# Altium PCB SolenoidValveDriver_v01_PCB.PcbDoc
Units mm, origin at the board's own origin, x right, y up, seen from the top; angles counter-clockwise.
Board outline 35 x 28 mm, 2 copper layers (Top Layer, Bottom Layer); 20 components, 12 nets, 63 pads, 10 vias.
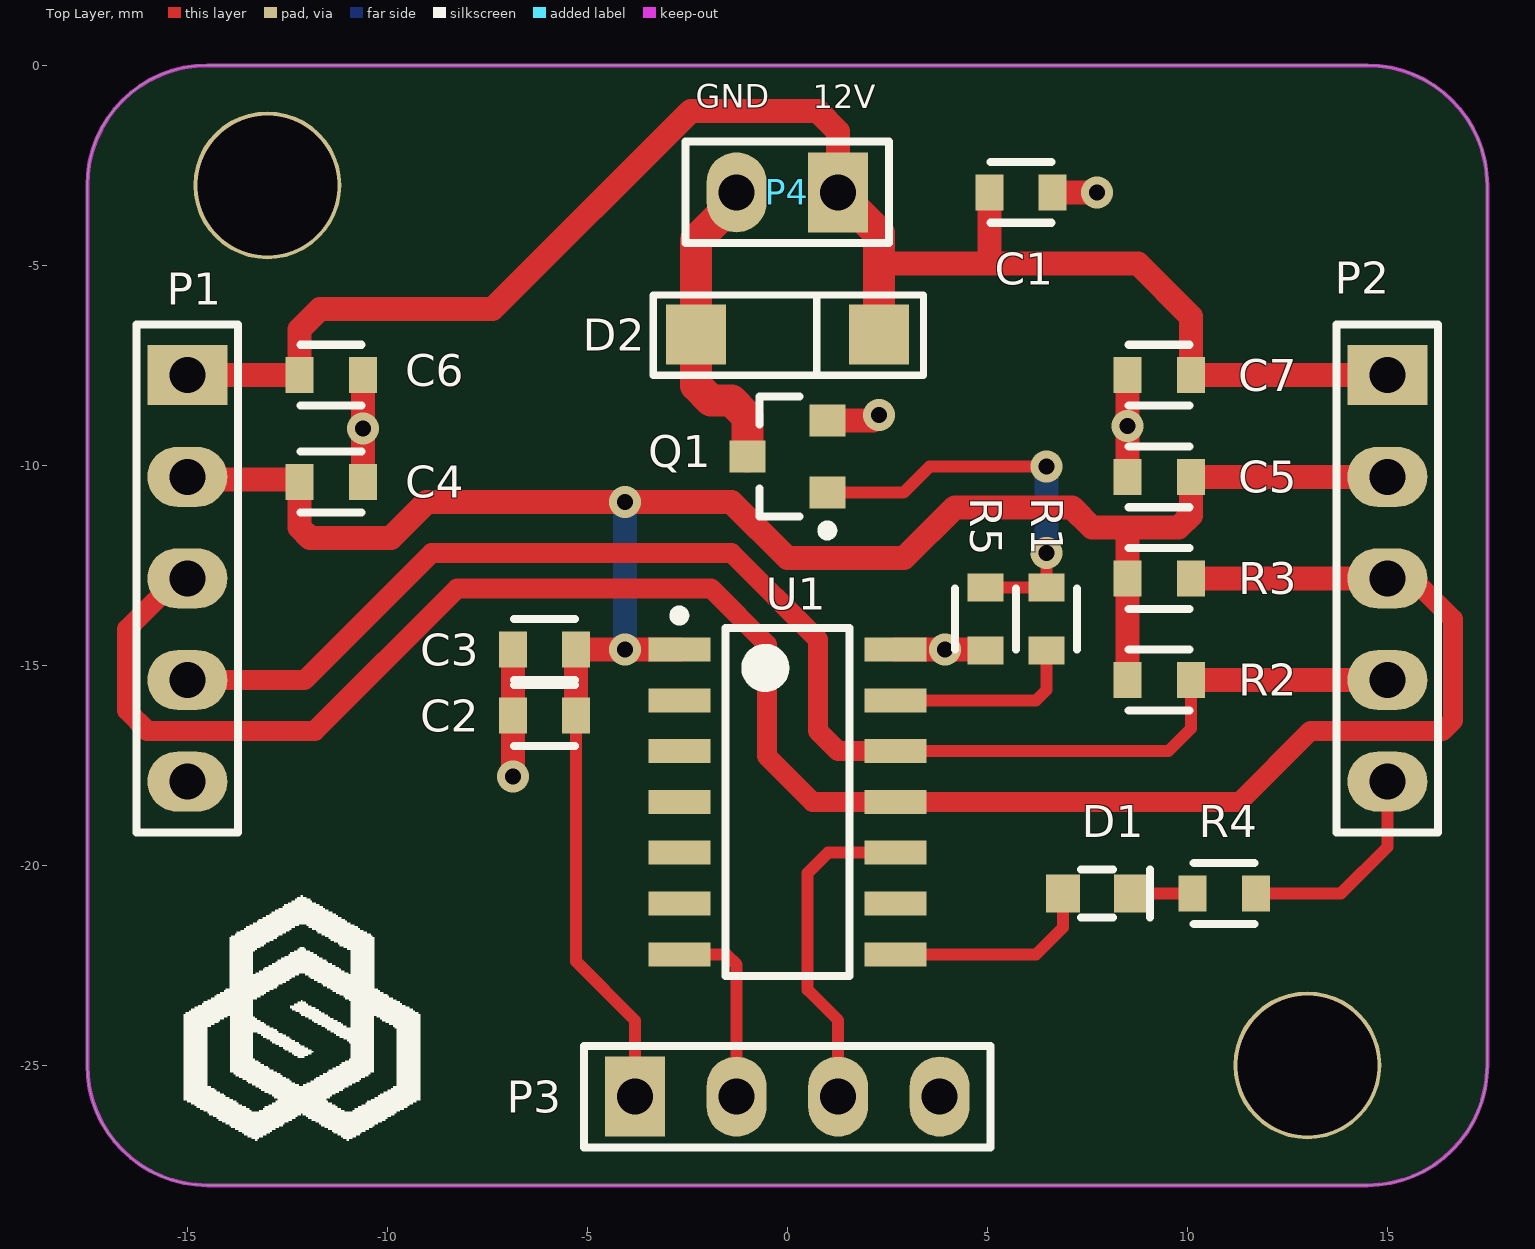
[diagram p0: Top Layer view]
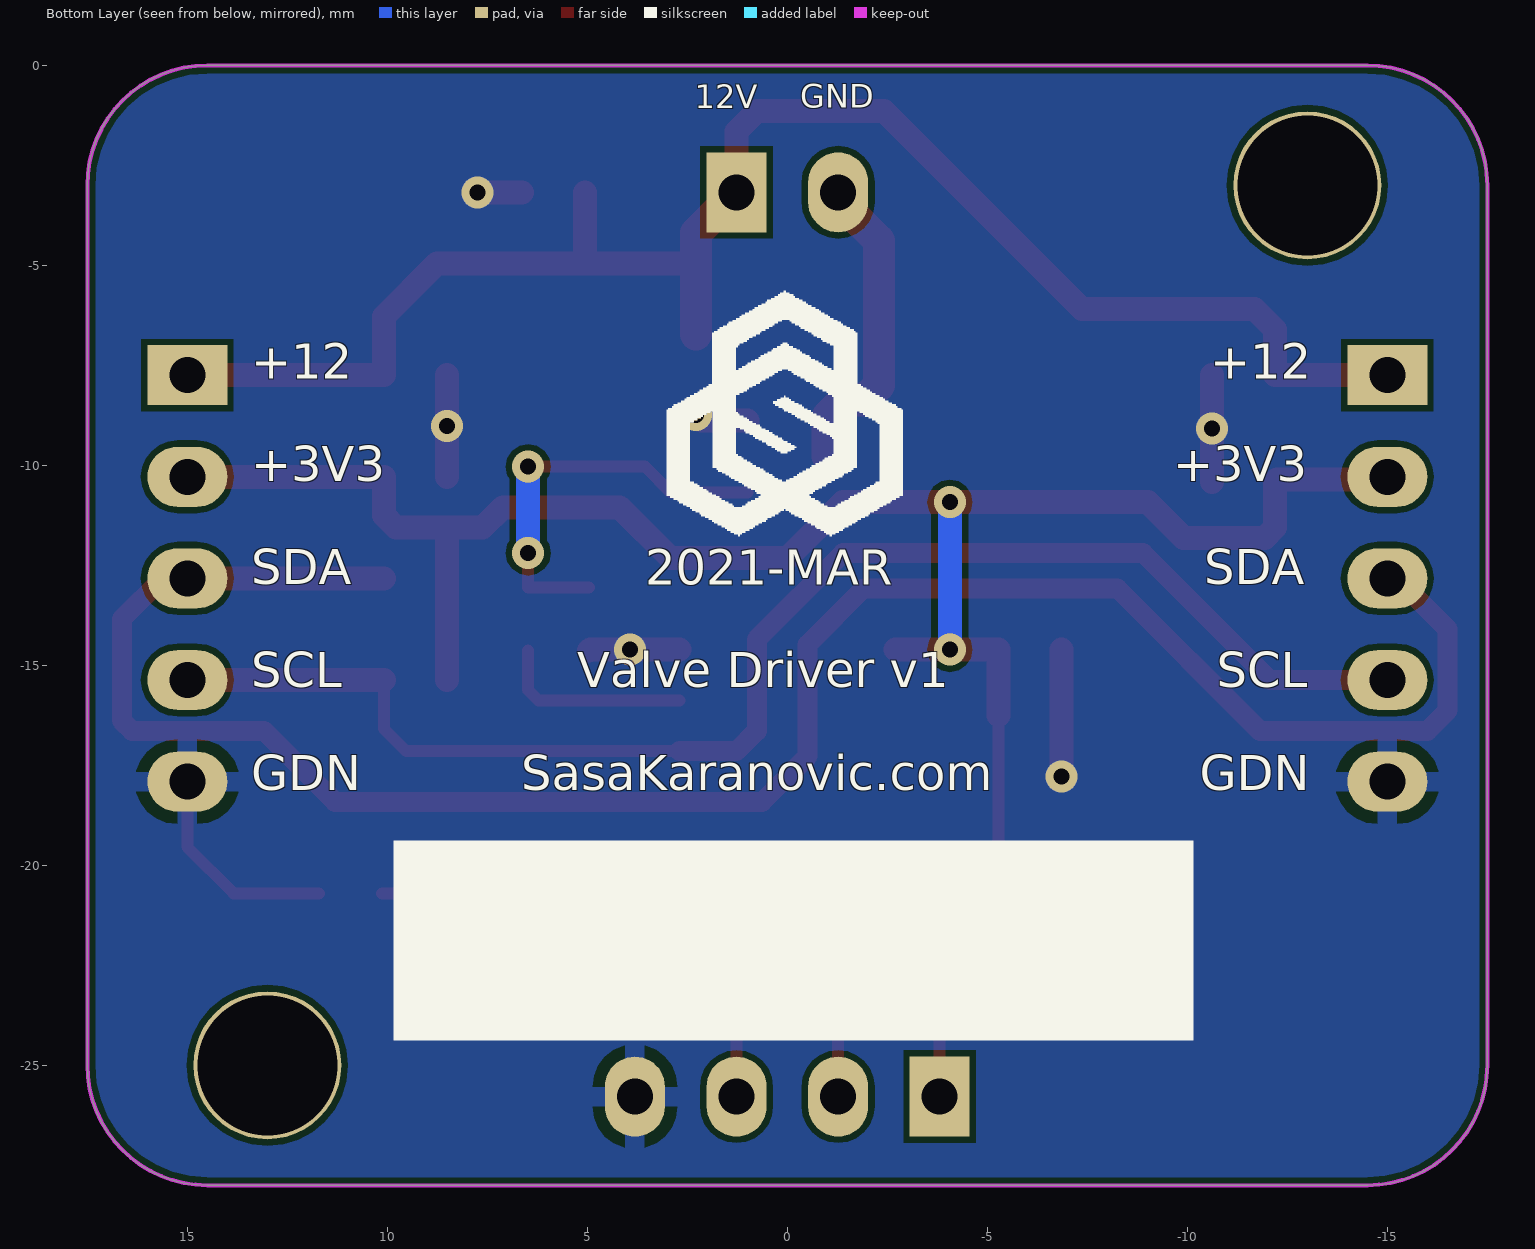
[diagram p1: Bottom Layer view, seen from below]
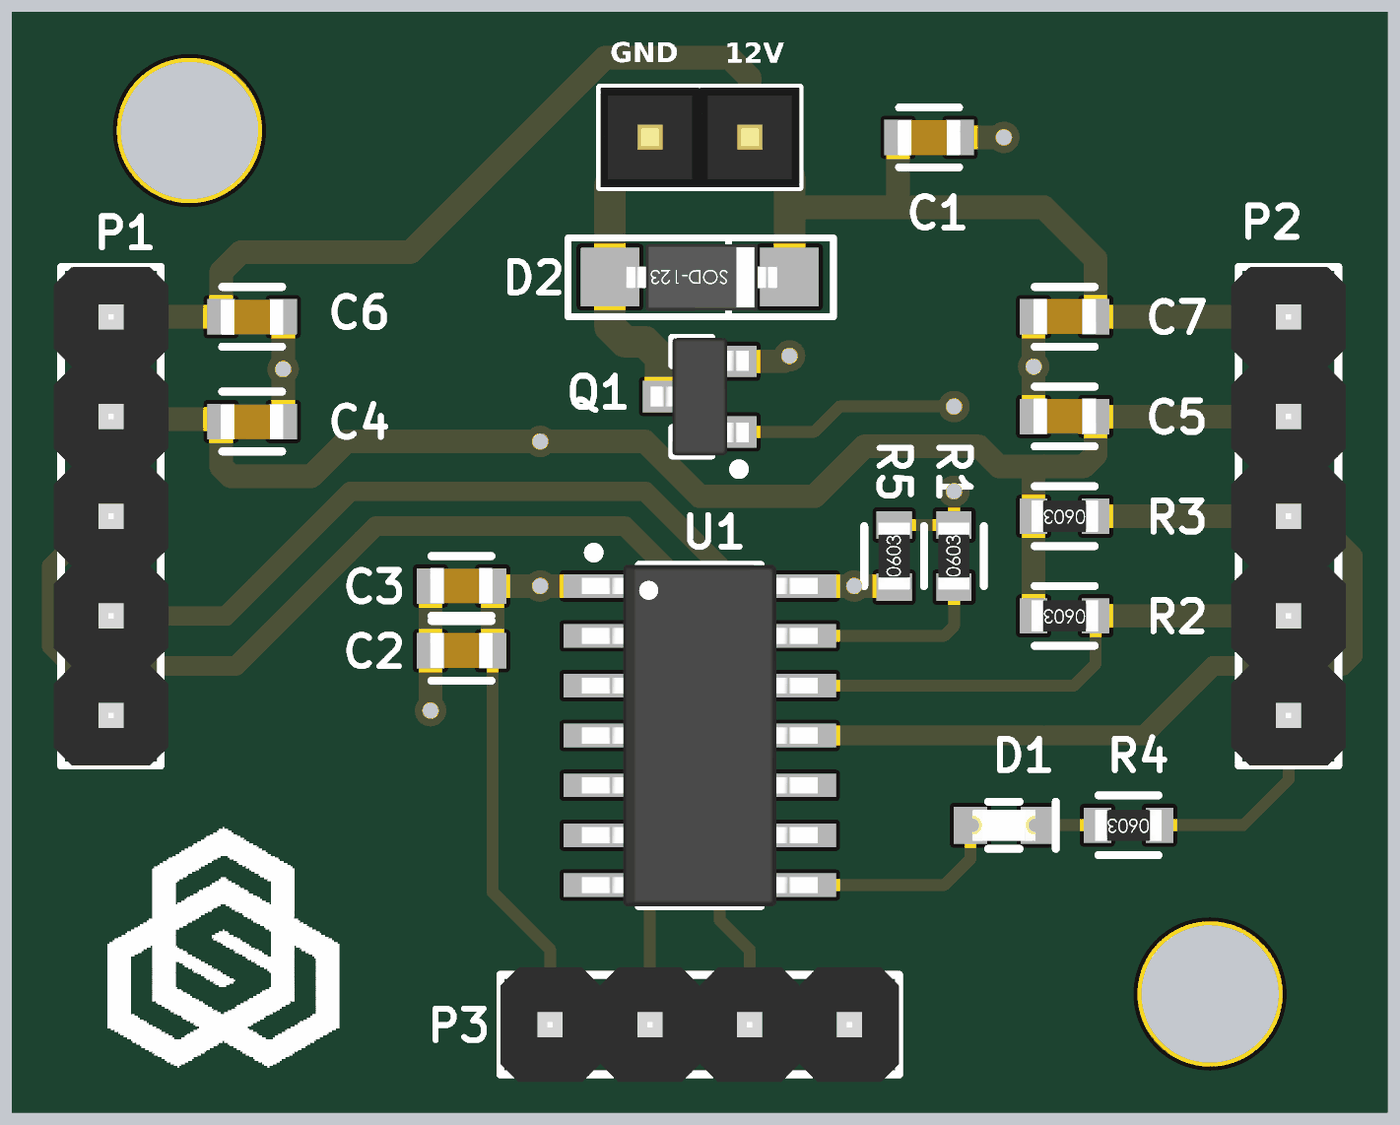
[diagram p2: 3D render of the assembled board from above, using the file's embedded part models]

## Layer stack, top to bottom
Top Solder: solder mask 0.0102, Solder Resist, Dk 3.5
Top Layer: signal copper 0.0356
Dielectric 1: dielectric 0.32, FR-4, Dk 4.8
Bottom Layer: signal copper 0.0356
Bottom Solder: solder mask 0.0102, Solder Resist, Dk 3.5

## Board outline
-17.5,-25 ccw(c-14.5,-25) -14.5,-28 14.5,-28 ccw(c14.5,-25) 17.5,-25 17.5,-3 ccw(c14.5,-3) 14.5,0 -14.5,0 ccw(c-14.5,-3) -17.5,-3

## Design rules (kind name [scope] priority, off if disabled: settings)
Clearance [All] p1: gap=0.152 ignorepadtopadclearanceinfootprint=FALSE
HoleSize [All] p1: absolutevalues=TRUE maxlimit=50 minlimit=0.4 maxpercent=80.000 minpercent=20.000
MinimumSolderMaskSliver [All] p1 off: minsoldermaskwidth=0.1
PlaneConnect [All] p1: pad.planeconnectstyle=Relief pad.reliefexpansion=0.508 pad.reliefentries=4 pad.reliefconductorwidth=0.254 pad.reliefairgap=0.254 via.planeconnectstyle=Direct via.reliefexpansion=0.508 via.reliefentries=4 via.reliefconductorwidth=0.254 via.reliefairgap=0.254
PolygonConnect [All] p1: thpad.connectstyle=Relief thpad.reliefconductorwidth=0.5 thpad.reliefentries=4 thpad.polygonreliefangle="90 Angle" thpad.airgapwidth=0.3 smdpad.connectstyle=Relief smdpad.reliefconductorwidth=0.254 smdpad.reliefentries=4 smdpad.polygonreliefangle="90 Angle" smdpad.airgapwidth=0.254 via.connectstyle=Direct via.reliefconductorwidth=0.254 via.reliefentries=4 via.polygonreliefangle="90 Angle" via.airgapwidth=0.254
RoutingVias [All] p1: holewidth=0.8 width=0.8 viastyle="Through Hole" minholewidth=0.3 minwidth=0.6 maxholewidth=0.4 maxwidth=50
SilkToSilkClearance [All] p1 off: silktosilkclearance=0.1
SilkToSolderMaskClearance [IsPad] p1 off: minsilkscreentomaskgap=0.1 clearancetoexposedcopper=TRUE
SolderMaskExpansion [All] p1: expansion=0.102 istentingtop=FALSE
Width [All] p1: maxlimit=50 minlimit=0.154 preferedwidth=0.2
25 further rules are at their usual default settings.

## Components (designator, comment, footprint, x,y, rotation, side; value= is the part's Value field where it differs from the comment)
C1 "Cap" "0603 - CAP" 5.842,-3.175 r180 top value=22uF
C2 "Cap" "0603 - CAP" -6.07,-16.256 r0 top value=100nF
C3 "Cap" "0603 - CAP" -6.07,-14.605 r0 top value=1uF
C4 "Cap" "0603 - CAP" -11.404,-10.414 r180 top value=100n
C5 "Cap" "0603 - CAP" 9.297,-10.287 r0 top value=100n
C6 "Cap" "0603 - CAP" -11.404,-7.747 r180 top value=100n
C7 "Cap" "0603 - CAP" 9.297,-7.747 r0 top value=100n
D1 "LED" "0603 Diode" 7.747,-20.701 r0 top
D2 "1N4148" SOD123 0,-6.731 r0 top
P1 "Header 5" "Header 5x1" -15,-7.747 r270 top
P2 "Header 5" "Header 5x1" 15,-7.747 r270 top
P3 "Header 4" "Header 4x1" -3.81,-25.781 r0 top
P4 "Solenoid Connector" "Header 2x1" 1.27,-3.175 r180 top
Q1 "DMN62D0U-13" SOT90P240X100-3N 0,-9.779 r180 top
R1 "Res" 0603 6.477,-13.843 r90 top value=100R
R2 "Res" 0603 9.297,-15.367 r180 top value=DNP
R3 "Res" 0603 9.297,-12.827 r180 top value=DNP
R4 "Res" 0603 10.922,-20.701 r180 top value=1K
R5 "Res" 0603 4.953,-13.843 r90 top value=100K
U1 "ATTiny814" SOIC127P600X175-14N 0,-18.415 r0 top

## Footprints (in the part's own frame and the unit in brackets; to place one, negate y for a bottom-side part, rotate by r counter-clockwise, add the part's x,y. Pads: shape width x height; smd on the part's side, far side on the other; paste and mask are expansions set on the pad)
0603 [mm]
  rect 0.7x0.9 smd: 1(-0.79,0) 2(0.79,0)
  silkscreen extent -0.76,-0.76 0.76,0.76, body extent -0.85,-0.4 0.85,0.4, height 0.56
"0603 - CAP" [mm]
  rect 0.7x0.9 smd: 1(-0.79,0) 2(0.79,0)
  silkscreen extent -0.76,-0.76 0.76,0.76, body extent -0.8,-0.44 0.8,0.46, height 0.8
"0603 Diode" [mm] "0603 Package for Diode"
  rect 0.85x0.95 smd: A(-0.85,0) K(0.85,0)
  silkscreen extent -0.4,-0.6 1.32,0.6, body extent -0.8,-0.4 0.8,0.4, height 0.7
"Header 2x1" [mm] "Jumper 2x2,54mm"
  rect 1.5x2 hole 0.9: 1(0,0)
  oval 1.5x2 hole 0.9: 2(2.54,0)
  silkscreen extent -1.27,-1.27 3.81,1.27, body extent -1.28,-1.27 3.8,1.27, height 8.49
"Header 4x1" [mm] "Connector; Header; 4 Position"
  rect 1.5x2 hole 0.9: 1(0,0)
  oval 1.5x2 hole 0.9: 2(2.54,0) 3(5.08,0) 4(7.62,0)
  silkscreen extent -1.27,-1.27 8.89,1.27, body extent -1.27,-1.46 8.89,1.46, height 8.51
"Header 5x1" [mm] "Connector; Header; 5 Position"
  rect 1.5x2 hole 0.9: 1(0,0)
  oval 1.5x2 hole 0.9: 2(2.54,0) 3(5.08,0) 4(7.62,0) 5(10.16,0)
  silkscreen extent -1.27,-1.27 11.43,1.27, body extent -1.27,-1.46 11.43,1.46, height 8.51
SOD123 [mm]
  rect 1.5x1.5 smd: A(-2.286,0) K(2.286,0)
  silkscreen extent -3.35,-1.02 3.4,0.99, body extent -1.87,-0.86 1.98,0.84, height 1.47
SOIC127P600X175-14N [mm] "SOIC, 14-Leads, Body 8.65x3.90mm, Pitch 1.27mm, IPC Medium Density"
  rect 1.55x0.6 smd: 1(-2.7,3.81) 2(-2.7,2.54) 3(-2.7,1.27) 4(-2.7,0) 5(-2.7,-1.27) 6(-2.7,-2.54) 7(-2.7,-3.81) 8(2.7,-3.81) 9(2.7,-2.54) 10(2.7,-1.27) 11(2.7,0) 12(2.7,1.27) 13(2.7,2.54) 14(2.7,3.81)
  silkscreen extent -2.82,-4.35 1.55,4.78, body extent -3,-4.35 3,4.35, height 1.75
SOT90P240X100-3N [mm] "SOT23, 3-Leads, Body 2.90x2.40mm, Pitch 0.90mm, IPC Medium Density"
  rect 0.9x0.8 smd: 1(-1,0.9) 2(-1,-0.9) 3(1,0)
  silkscreen extent -1.13,-1.5 0.7,1.97, body extent -1.25,-1.5 1.25,1.5, height 1

## Part data
C1: "Capacitor", Distributor Part Number=1276-3051-1-ND, Manufacturer="Samsung Electro-Mechanics", Manufacturer Part Number=CL31A226MPHNNNE, Distributor=DigiKey
C2: "Capacitor", Distributor Part Number=1276-CL10B104KB8NNNLCT-ND, Manufacturer="Samsung Electro-Mechanics", Manufacturer Part Number=CL10B104KB8NNNL, Distributor=DigiKey
C3: "Capacitor", Distributor Part Number=1276-3091-1-ND, Manufacturer="Samsung Electro-Mechanics", Manufacturer Part Number=CL31B105KBHNFNE, Distributor=DigiKey
C4 C5 C6 C7: "CAP CER 0.1UF 50V X7R 0603", Distributor Part Number=1276-CL10B104KB8NNNLCT-ND, Manufacturer="Samsung Electro-Mechanics", Manufacturer Part Number=CL10B104KB8NNNL, Distributor=DigiKey
D1: "Typical RED GaAs LED", Distributor Part Number=732-4978-1-ND, Manufacturer="Würth Elektronik", Manufacturer Part Number=150060RS75000, Distributor=DigiKey
D2: library part Diode, "DIODE GEN PURP 100V 300MA SOD123", Distributor Part Number=1N4148W-FDICT-ND, Manufacturer="Diodes Incorporated", Manufacturer Part Number=1N4148W-7-F, Distributor=DigiKey
P1 P2: "Header, 5-Pin", Distributor Part Number=952-2246-ND, Manufacturer="Harwin Inc.", Manufacturer Part Number=M20-9960545, Distributor=DigiKey
P3: "Header, 4-Pin", Distributor=DigiKey
P4: library part "Header 2", "Header, 2-Pin", Distributor Part Number=952-2244-ND, Manufacturer="Harwin Inc.", Manufacturer Part Number=M20-9960245, Distributor=DigiKey
Q1: "MOSFET N-CH 60V 0.38A", Distributor Part Number=DMN62D0U-13DICT-ND, Manufacturer="Diodes Incorporated", Distributor=DigiKey, Manufacturer Part Number=DMN62D0U-13
R1: "RES SMD 0 OHM JUMPER 1/10W 0603", Distributor Part Number=311-0.0LECT-ND, Manufacturer=Yageo, Manufacturer Part Number=AC0603JR-070RL, Distributor=DigiKey
R2 R3: "Resistor"
R4: "Resistor", Distributor Part Number=311-1.0KGRCT-ND, Manufacturer=Yageo, Manufacturer Part Number=RC0603JR-071KL, Distributor=DigiKey
R5: "RES SMD 1M OHM 5% 1/10W 0603", Distributor Part Number=311-1.0MGRCT-ND, Manufacturer=Yageo, Manufacturer Part Number=RC0603JR-071ML, Distributor=DigiKey
U1: "IC MCU 8BIT 8KB FLASH 14SOIC", Distributor Part Number=ATTINY814-SSNRCT-ND, Manufacturer="Microchip Technology", Manufacturer Part Number=ATTINY814-SSNR, Distributor=DigiKey

## Free pads (board coordinates)
  round 3.7 hole 3.5 unplated: ""(-13,-3) ""(13,-25)

## Via types
v1: diameter 0.8, hole 0.4, Top Layer to Bottom Layer, tented both sides, 10 vias

## Nets (pads, with @x,y where several pads share a name; then routed paths per layer and width w, separated by ;. In a path a pad name is that pad's centre, name@x,y a point inside that pad or via, vN(x,y) a via of type N, cw(c..) or ccw(c..) an arc to the next point about the centre after c; other vN are vias at no path point)
3V3: C2.2 C3.2 C4.2 C5.2 P1.2 P2.2 P3.1 R2.2 R3.2 U1.1 | length 55.9
  Top Layer w0.3: C2.2 -5.28,-22.406 -3.81,-23.876 P3.1
  Top Layer w0.6: P1.2 -14.937,-10.351 -12.244,-10.351 -12.194,-10.401 C4.2 -12.194,-11.555 -11.938,-11.811 -9.906,-11.811 -9.017,-10.922 v1(-4.064,-10.922) -1.397,-10.922 0,-12.319 2.921,-12.319 4.191,-11.049 7.112,-11.049 7.62,-11.557 8.509,-11.557 ; C2.2 C3.2 v1(-4.064,-14.605) U1.1 ; R2.2 R3.2 8.507,-11.559 8.509,-11.557 ; P2.2 C5.2 10.087,-11.249 9.779,-11.557 8.509,-11.557
  Bottom Layer w0.6: v1(-4.064,-14.605) v1(-4.064,-10.922)
12V: C1.2 C6.2 C7.2 D2.K P1.1 P2.1 P4.1 | length 41.9
  Top Layer w0.6: P1.1 C6.2 -12.194,-6.606 -11.684,-6.096 -7.366,-6.096 -2.413,-1.143 0.762,-1.143 1.27,-1.651 P4.1 ; 2.286,-4.953 5.08,-4.953 ; C1.2 5.052,-4.925 5.08,-4.953 ; P2.1 C7.2 10.087,-6.277 8.763,-4.953 5.08,-4.953
  Top Layer w0.8: P4.1 2.286,-4.191 2.286,-4.953 D2.K
GND: C1.1 C2.1 C3.1 C4.1 C5.1 C6.1 C7.1 P1.5 P2.5 P3.4 Q1.2 R4.1 R5.1 U1.14 | length 20.2
  Top Layer w0.3: R4.1 13.843,-20.701 15,-19.544 P2.5
  Top Layer w0.6: C4.1 v1(-10.614,-9.08) C6.1 ; C2.1 C3.1 -6.858,-14.607 v1(-6.858,-17.78) ; Q1.2 2.148,-8.879 v1(2.286,-8.741) ; U1.14 4.925,-14.605 R5.1 ; C1.1 v1(7.747,-3.175) ; C5.1 v1(8.507,-9.017) C7.1
  other v1: 3.937,-14.605
NetD1_K: D1.K R4.2 | length 1.5
  Top Layer w0.3: D1.K R4.2
NetD2_A: D2.A P4.2 Q1.3 | length 7.9
  Top Layer w0.8: P4.2 -1.27,-3.364 -2.286,-4.38 D2.A -2.286,-8.001 -1.905,-8.382 -1.397,-8.382 -1,-8.779 Q1.3
NetQ1_1: Q1.1 R1.2 R5.2 | length 10.3
  Top Layer w0.3: Q1.1 2.91,-10.679 3.556,-10.033 v1(6.477,-10.033) ; R5.2 R1.2 v1(6.477,-12.192)
  Bottom Layer w0.6: v1(6.477,-12.192) v1(6.477,-10.033)
PA0_RST: P3.3 U1.10 | length 8.3
  Top Layer w0.3: P3.3 1.27,-23.876 0.508,-23.114 0.508,-20.193 1.016,-19.685 U1.10
PA1_SDA: P1.3 P2.3 R3.1 U1.11 | length 53.1
  Top Layer w0.4: P1.3@-15.24,-12.827 P1.3
  Top Layer w0.5: P1.3@-15.24,-12.827 -16.51,-14.097 -16.51,-16.129 -16.002,-16.637 -11.811,-16.637 -8.255,-13.081 -1.905,-13.081 -0.508,-14.478 -0.508,-17.272 0.635,-18.415 U1.11 11.303,-18.415 13.081,-16.637 16.383,-16.637 16.637,-16.383 16.637,-13.843 15.621,-12.827 P2.3
  Top Layer w0.6: R3.1 P2.3
PA2_SCL: P1.4 P2.4 R2.1 U1.12 | length 36.2
  Top Layer w0.3: U1.12 9.525,-17.145 10.087,-16.583 R2.1
  Top Layer w0.5: P1.4 -12.065,-15.367 -8.89,-12.192 -1.397,-12.192 0.762,-14.351 0.762,-16.637 1.27,-17.145 U1.12
  Top Layer w0.6: R2.1 P2.4
PA3_VALVE: R1.1 U1.13 | length 4.9
  Top Layer w0.3: U1.13 6.223,-15.875 6.477,-15.621 R1.1
PB1_LED: D1.A U1.8 | length 5.3
  Top Layer w0.3: U1.8 6.223,-22.225 6.897,-21.551 D1.A
PB2_TXD: P3.2 U1.7 | length 4.8
  Top Layer w0.3: U1.7 -1.524,-22.225 -1.27,-22.479 P3.2
pads on no net: U1.2 U1.3 U1.4 U1.5 U1.6 U1.9

## Polygon pours and split planes (outlines as drawn)
GND on Bottom Layer "Top Layer-No Net" (solid, pour order 0): -17.5,-25 ccw(c-14.5,-25) -14.5,-28 14.5,-28 ccw(c14.5,-25) 17.5,-25 17.5,-3 ccw(c14.5,-3) 14.5,0 -14.5,0 ccw(c-14.5,-3) -17.5,-3

## Keep-outs
Keep-Out Layer:
  the board outline again, w0.1

## Silkscreen, mask and mechanical layers (free items; w line width, h text height)
Top Overlay:
  region: 305 vertices and 4 holes, not listed, extent -15.089,-26.884 -9.182,-20.747
  text "GND" at -2.286,-1.258 h1
  text "12V" at 0.635,-1.27 h1
Bottom Overlay:
  drawing of 2 lines, arcs and shapes, not listed
  text "GND" at -0.325,-1.258 h1
  text "12V" at 2.314,-1.27 h1
  text "+12" at -10.571,-8.128 h1.5
  text "+12" at 13.402,-8.128 h1.5
  text "+3V3" at -9.652,-10.687 h1.5
  text "+3V3" at 13.402,-10.687 h1.5
  text "SDA" at -10.422,-13.265 h1.5
  text "2021-MAR" at 3.548,-13.268 h1.5
  text "SDA" at 13.402,-13.265 h1.5
  text "SCL" at -10.735,-15.839 h1.5
  text "Valve Driver v1" at 5.248,-15.84 h1.5
  text "SCL" at 13.402,-15.839 h1.5
  text "GDN" at -10.308,-18.415 h1.5
  text "SasaKaranovic.com" at 6.655,-18.413 h1.5
  text "GDN" at 13.402,-18.415 h1.5
Drill Drawing:
  drawing of 221 lines, arcs and shapes, not listed
  text "Layer" at 43.449,6.477 h1.52
  text "Name" at 53.86,6.477 h1.52
  text "Material" at 77.476,6.477 h1.52
  text "Thickness" at 99.314,6.477 h1.52
  text "Constant" at 115.82,6.477 h1.52
  text "Board Layer Stack" at 130.294,6.477 h1.52
  text "Top Overlay" at 53.86,3.429 h1.52
  text "Top Solder" at 53.86,0.381 h1.52
  text "Solder Resist" at 77.476,0.381 h1.52
  text "0.010mm" at 99.314,0.381 h1.52
  text "3.5" at 115.82,0.381 h1.52
  text "1" at 43.449,-2.667 h1.52
  text "Top Layer" at 53.86,-2.667 h1.52
  text "0.036mm" at 99.314,-2.667 h1.52
  text "Dielectric 1" at 53.86,-5.715 h1.52
  text "FR-4" at 77.476,-5.715 h1.52
  text "0.320mm" at 99.314,-5.715 h1.52
  text "4.8" at 115.82,-5.715 h1.52
  text "2" at 43.449,-8.763 h1.52
  text "Bottom Layer" at 53.86,-8.763 h1.52
  text "0.036mm" at 99.314,-8.763 h1.52
  text "Bottom Solder" at 53.86,-11.811 h1.52
  text "Solder Resist" at 77.476,-11.811 h1.52
  text "0.010mm" at 99.314,-11.811 h1.52
  text "3.5" at 115.82,-11.811 h1.52
  text "Bottom Overlay" at 53.86,-14.859 h1.52
  text "Symbol" at 43.752,-24.32 h1.83
  text "Count" at 56.601,-24.32 h1.83
  text "Hole Size" at 70.313,-24.32 h1.83
  text "Plated" at 99.515,-24.32 h1.83
  text "Hole Type" at 112.364,-24.32 h1.83
  text "Via/Pad" at 131.002,-24.32 h1.83
  text "2" at 56.601,-28.13 h1.52
  text "3.500mm (137.79mil)" at 70.313,-28.13 h1.52
  text "NPTH" at 99.515,-28.13 h1.52
  text "Round" at 112.364,-28.13 h1.52
  text "Pad" at 131.002,-28.13 h1.52
  text "10" at 56.601,-31.941 h1.52
  text "0.400mm (15.75mil)" at 70.313,-31.941 h1.52
  text "PTH" at 99.515,-31.941 h1.52
  text "Round" at 112.364,-31.941 h1.52
  text "Via" at 131.002,-31.941 h1.52
  text "16" at 56.601,-35.75 h1.52
  text "0.900mm (35.43mil)" at 70.313,-35.75 h1.52
  text "PTH" at 99.515,-35.75 h1.52
  text "Round" at 112.364,-35.75 h1.52
  text "Pad" at 131.002,-35.75 h1.52
  text "28 Total" at 56.601,-39.56 h1.52

## Dimensions
-17.5,-25 to 17.5,-25 on Drill Drawing
-14.5,0 to -14.5,-28 on Drill Drawing